# EAGLE board pass (EAGLE 6.5.0)
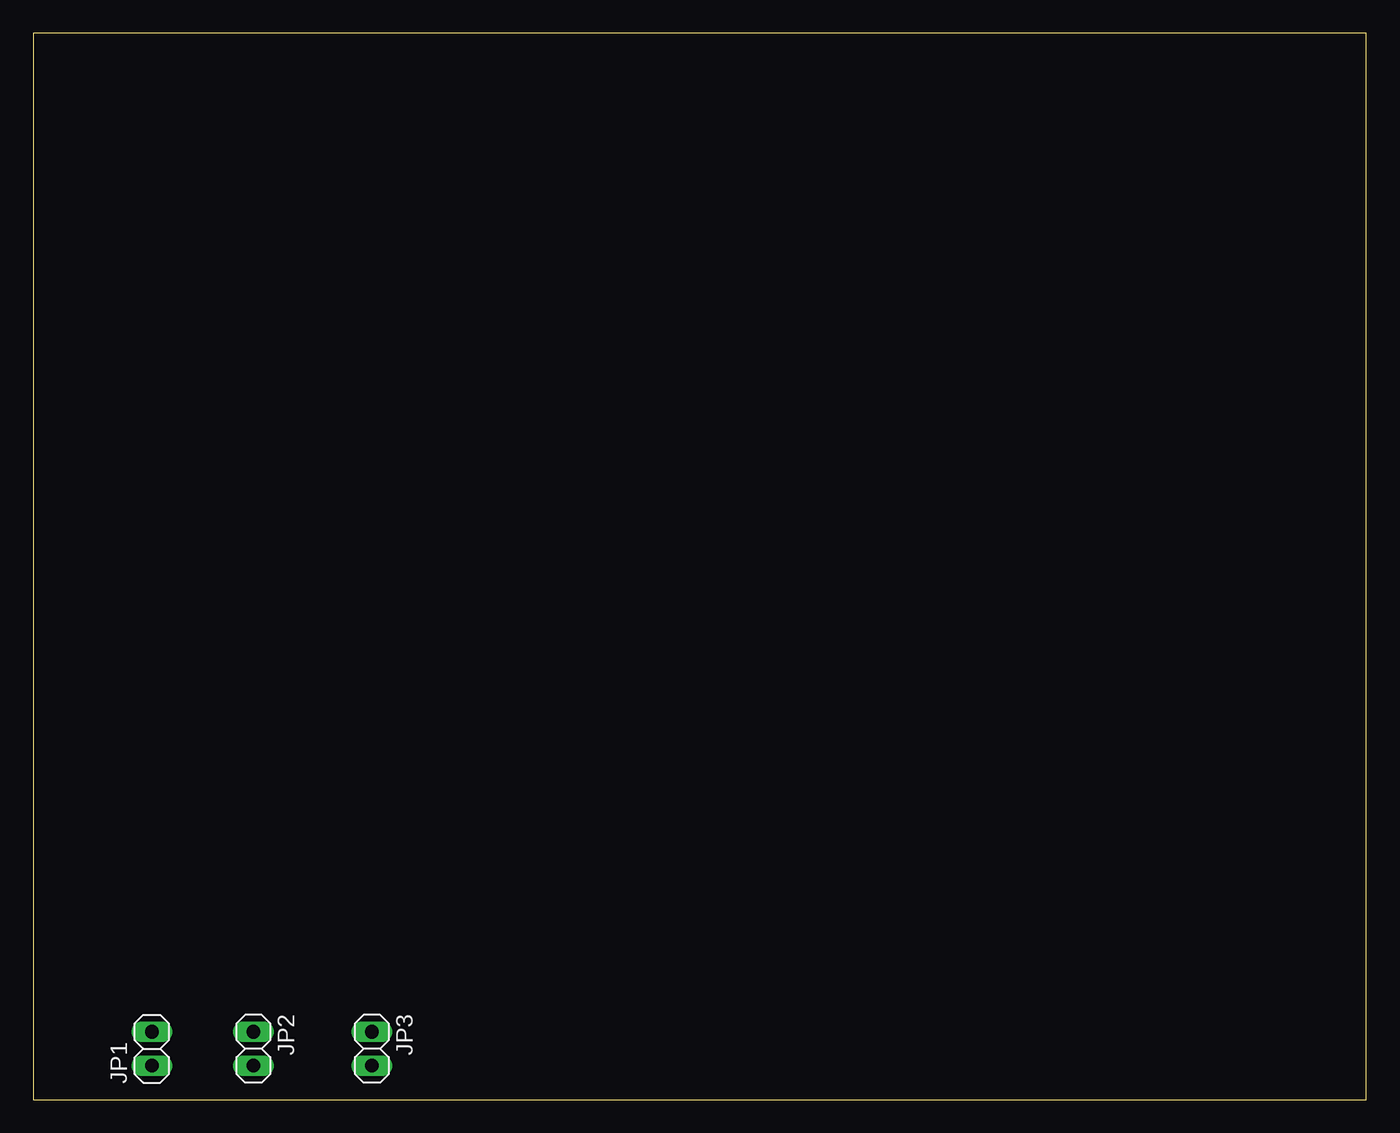
[diagram p0: board, top side]
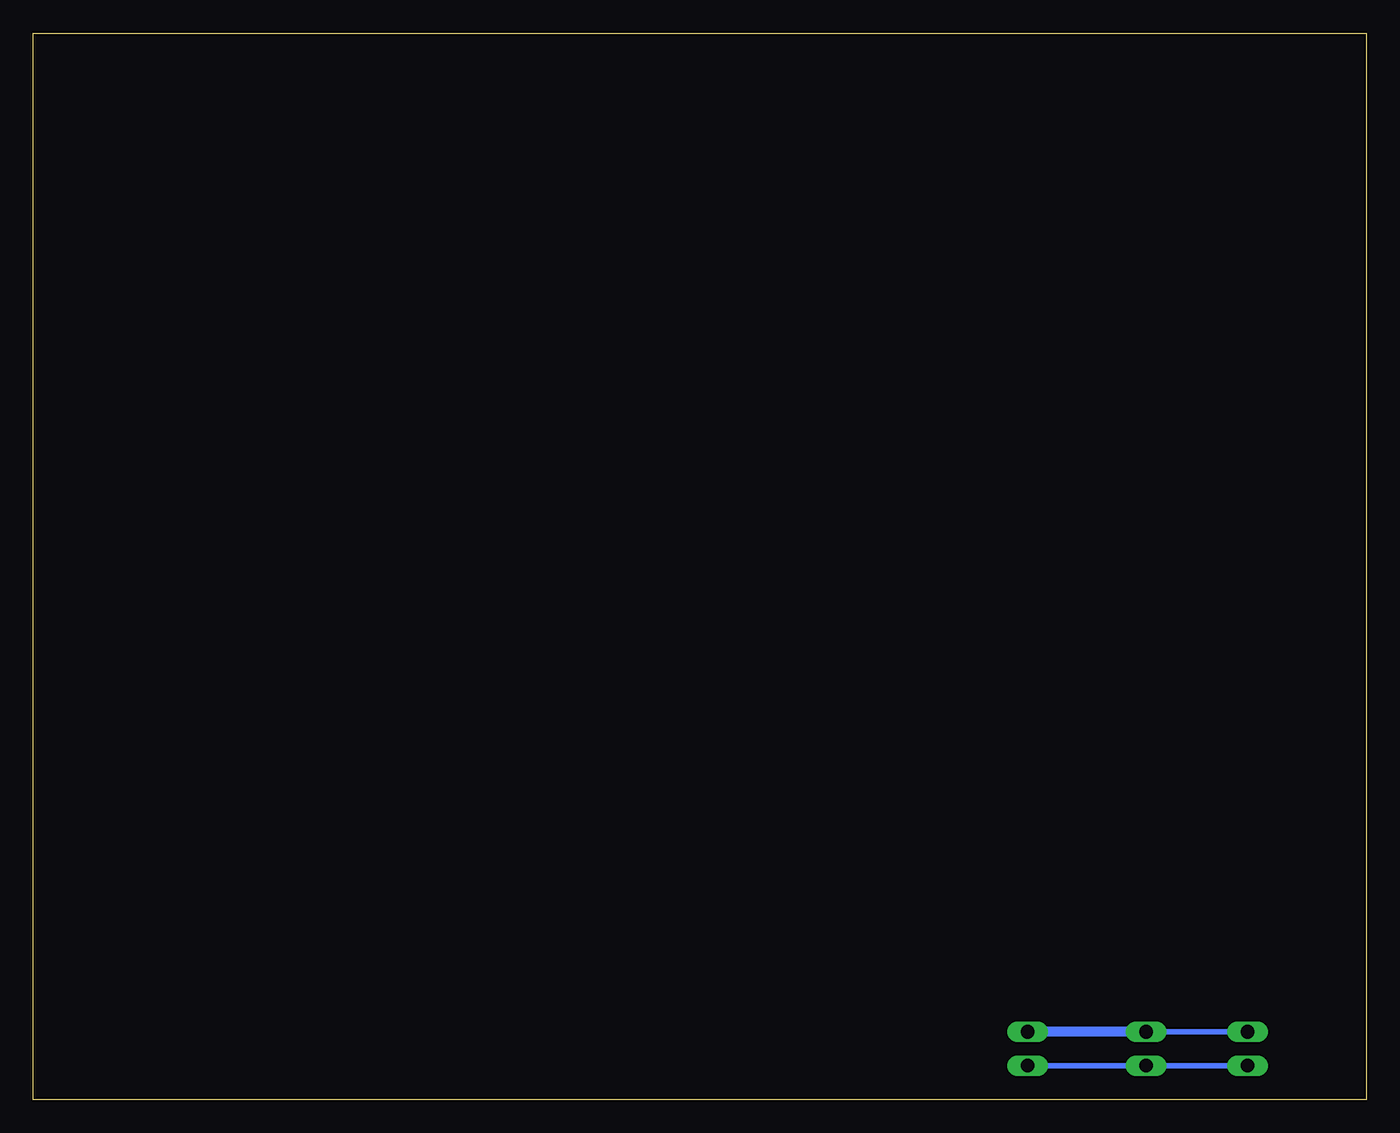
[diagram p1: board, bottom side, seen from below]

Size 100 x 80 mm. Coordinates in mm from the lower left corner, seen from the top.
Outline: 0,0 100,0 100,80 0,80 0,0
Copper layers (1*16): Top 0.035mm / dielectric 1.5mm / Bottom 0.035mm
Design rules "default": minimum track width 10mil, minimum drill 24mil, track to track 8mil, track to pad 8mil, pad to pad 8mil, via to via 8mil, smd to smd 8mil, copper to edge 40mil, drill to drill 8mil, minimum pad ring 10mil, minimum via ring 8mil, stop-mask expansion 4mil, vias tented up to drill 0mil, thermal gap 10mil

## Footprints (pad centres in the part's own frame; a part is rotated, then mirrored left to right if it is on the bottom)
1X02 = drill 1.016 long: 1 -1.27,0; 2 1.27,0

## Placement (x,y rotation side)
JP1  [1X02]  8.89,3.81 90 top
JP2  [1X02]  16.51,3.81 270 top
JP3  [1X02]  25.4,3.81 270 top

## Library data of the parts
JP1-JP3 = pinhead

## Nets
N$1: JP1.2 JP2.1 JP3.1
N$2: JP1.1 JP2.2 JP3.2

## Tracks (layer width: path | path; a pad name or v marks a point on that pad's centre or on a via)
N$1
  Bottom 0.406: JP1.2 JP2.1
  Bottom 0.762: JP2.1 JP3.1
N$2
  Bottom 0.406: JP3.2 JP2.2 JP1.1